# Altium PCB 1.PcbDoc
Units mm, origin at the board's own origin, x right, y up, seen from the top; angles counter-clockwise.
Board outline 89 x 81 mm, 4 copper layers (Top Layer, Internal Plane 1, Internal Plane 2, Bottom Layer); 70 components, 75 nets, 266 pads, 18 vias.
Unrouted connection lines stored in the file: 3.
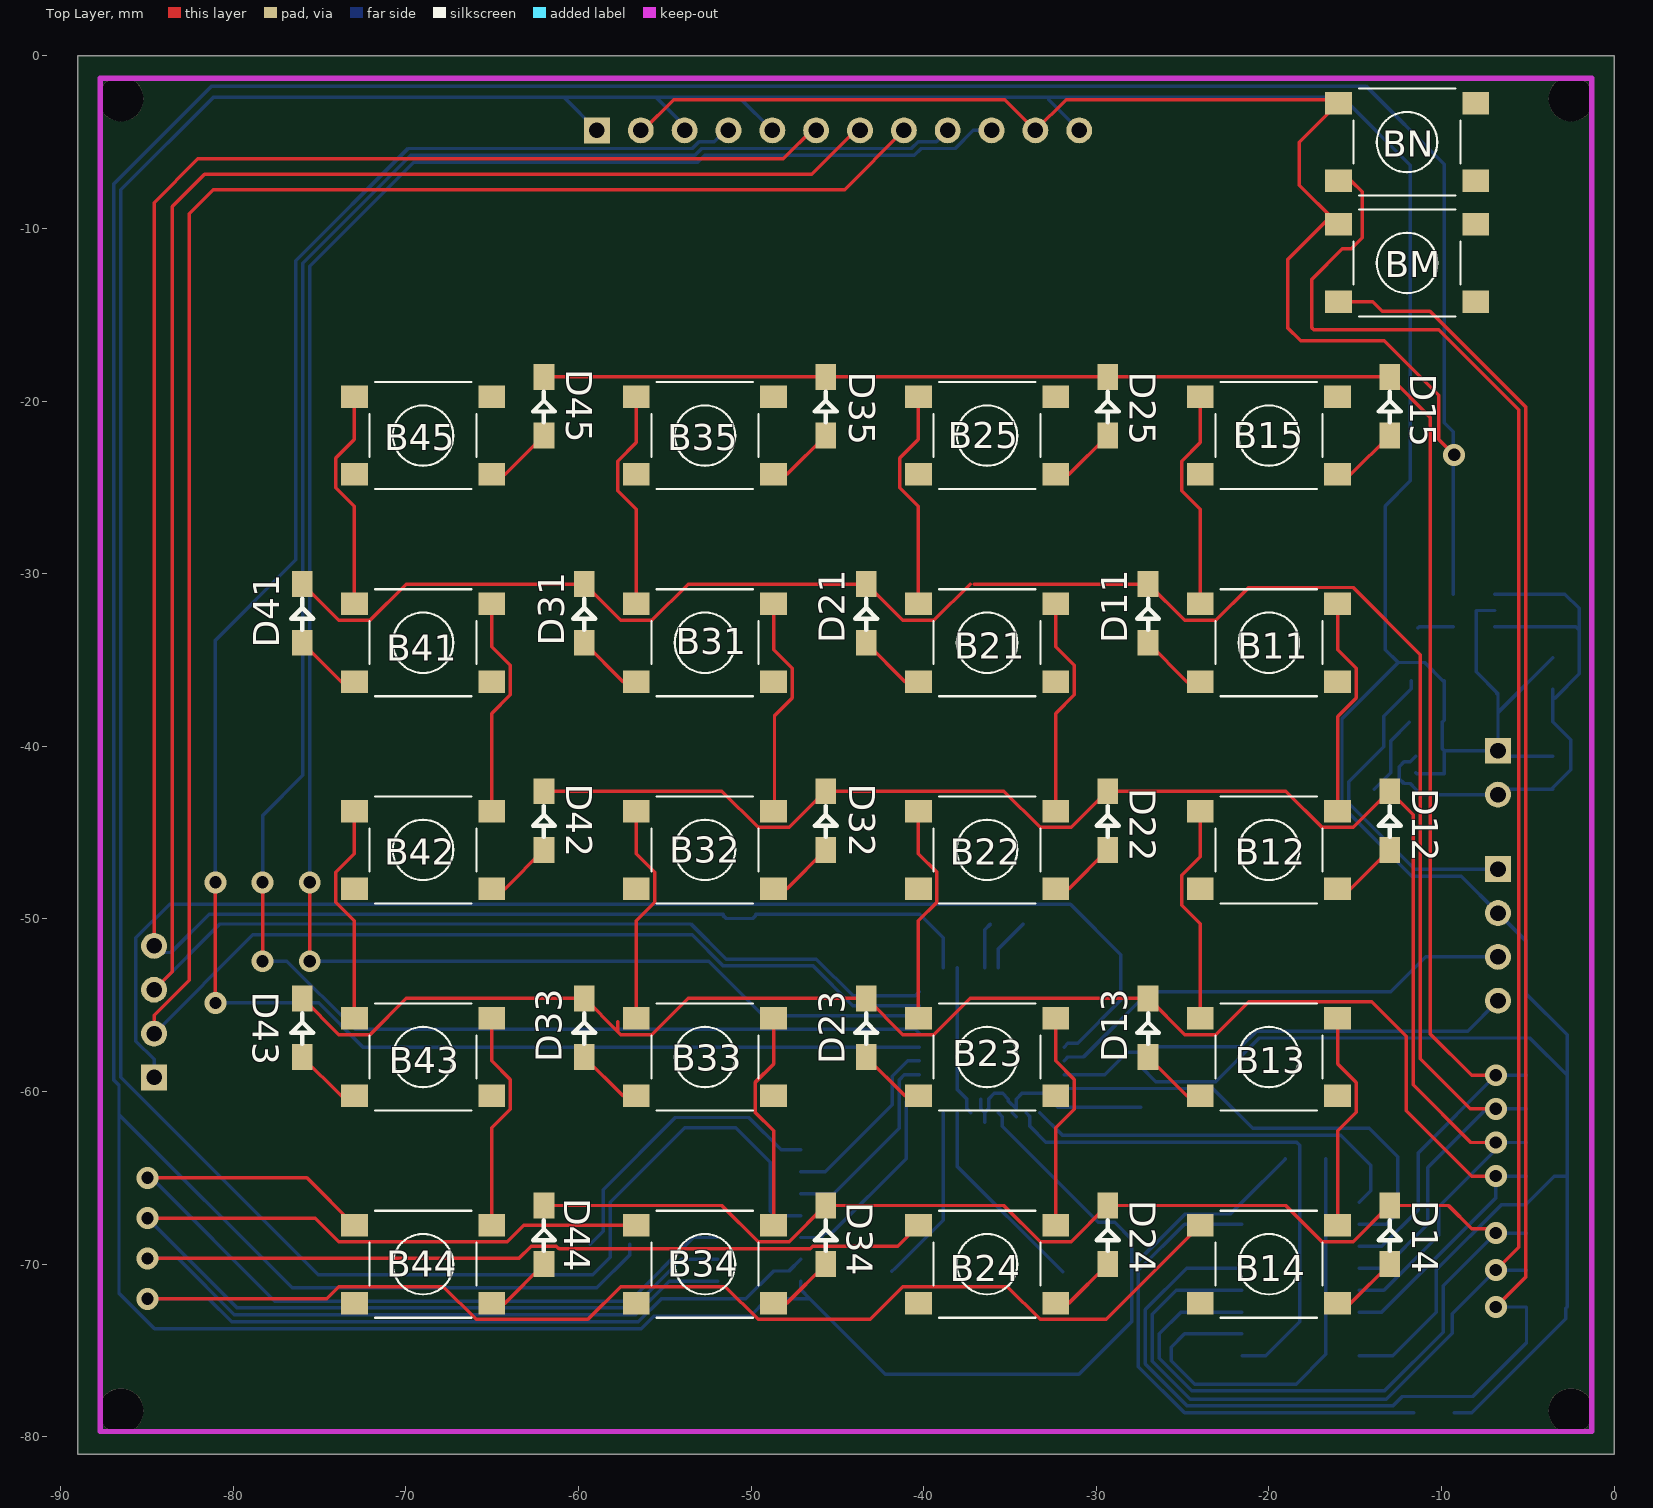
[diagram p0: Top Layer view]
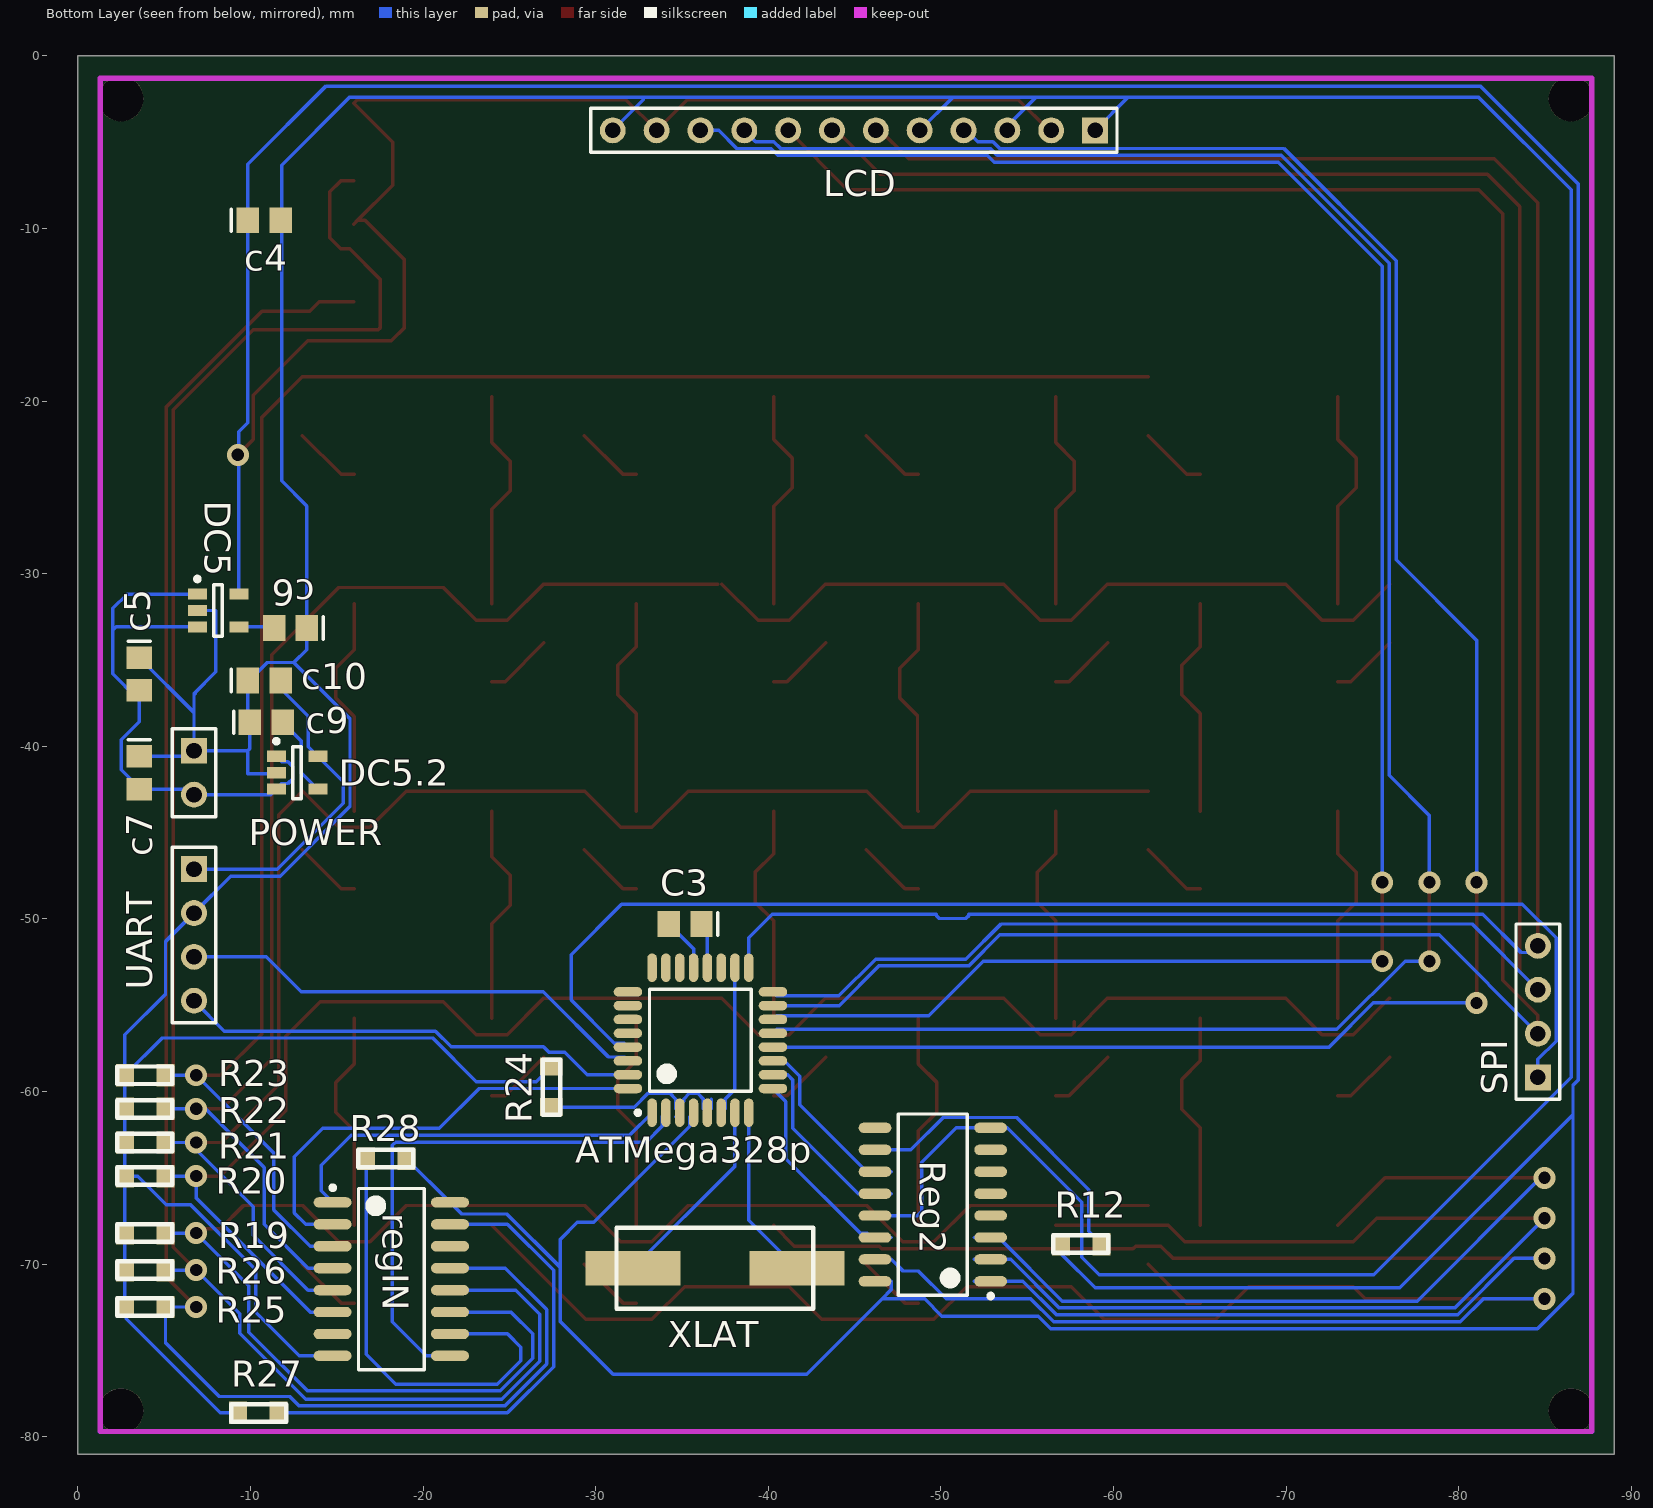
[diagram p1: Bottom Layer view, seen from below]
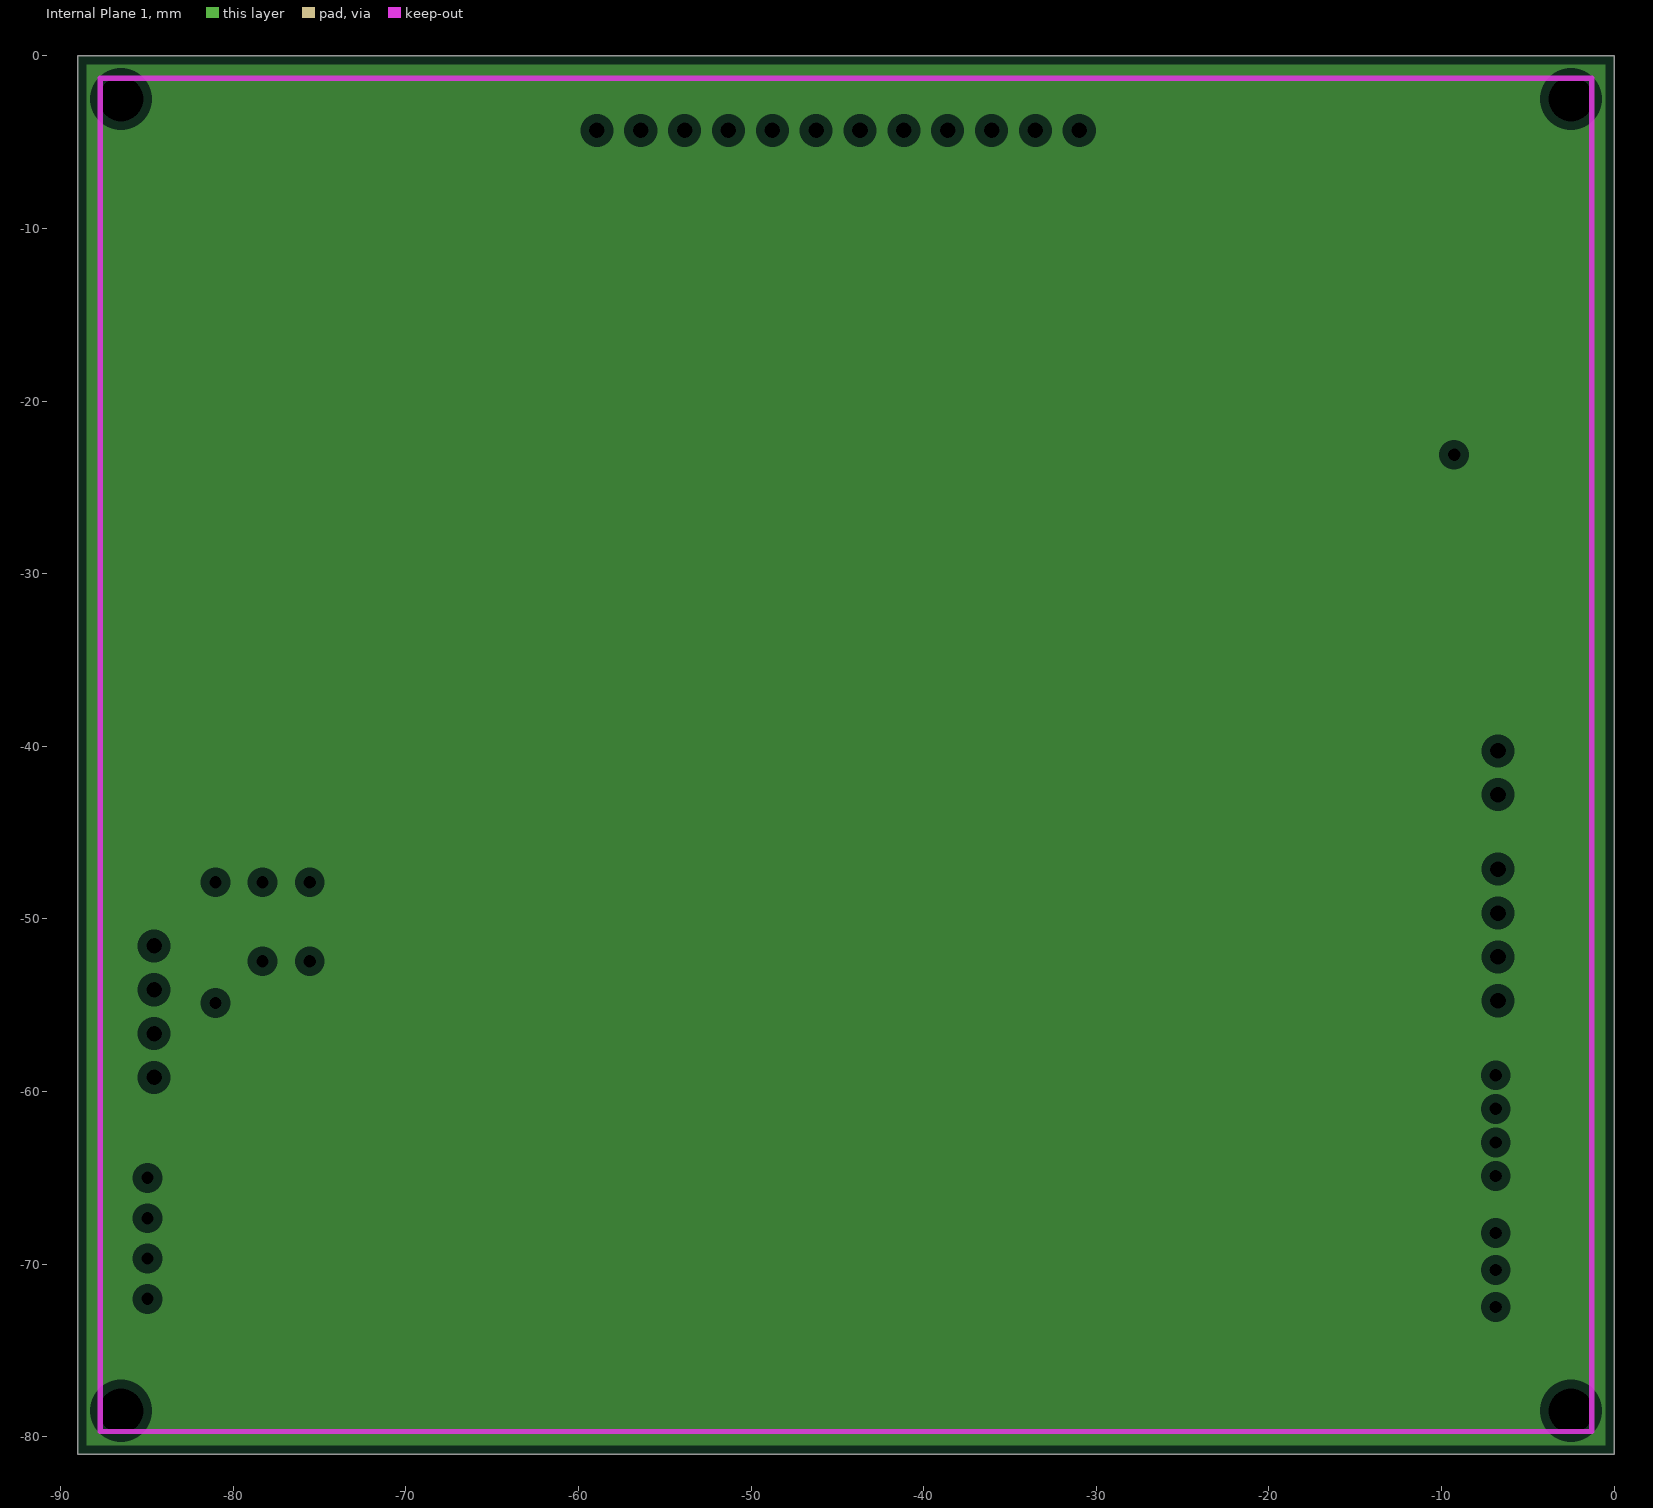
[diagram p2: Internal Plane 1, clearances drawn from the general rule]
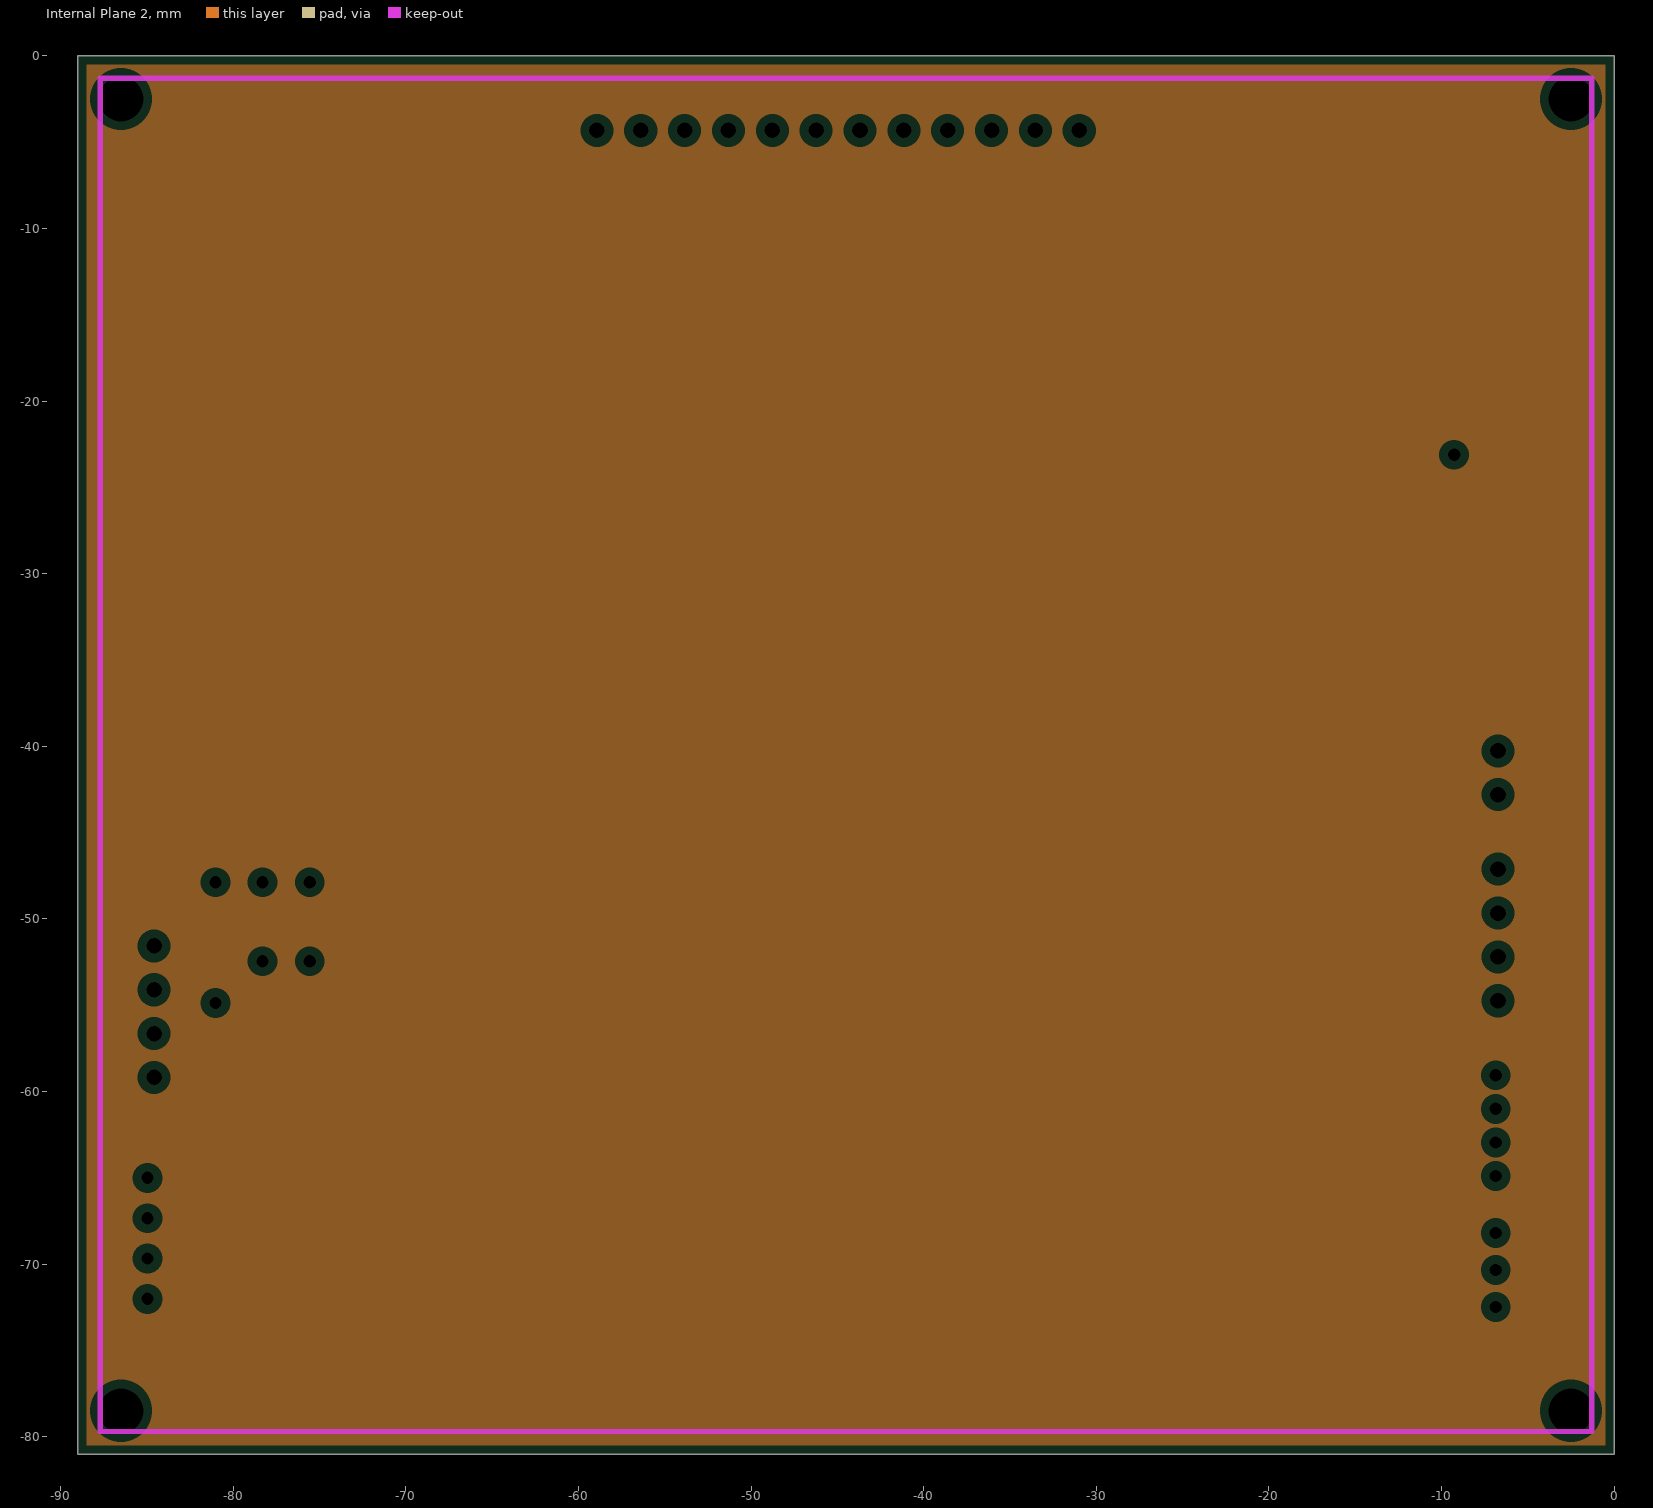
[diagram p3: Internal Plane 2, clearances drawn from the general rule]
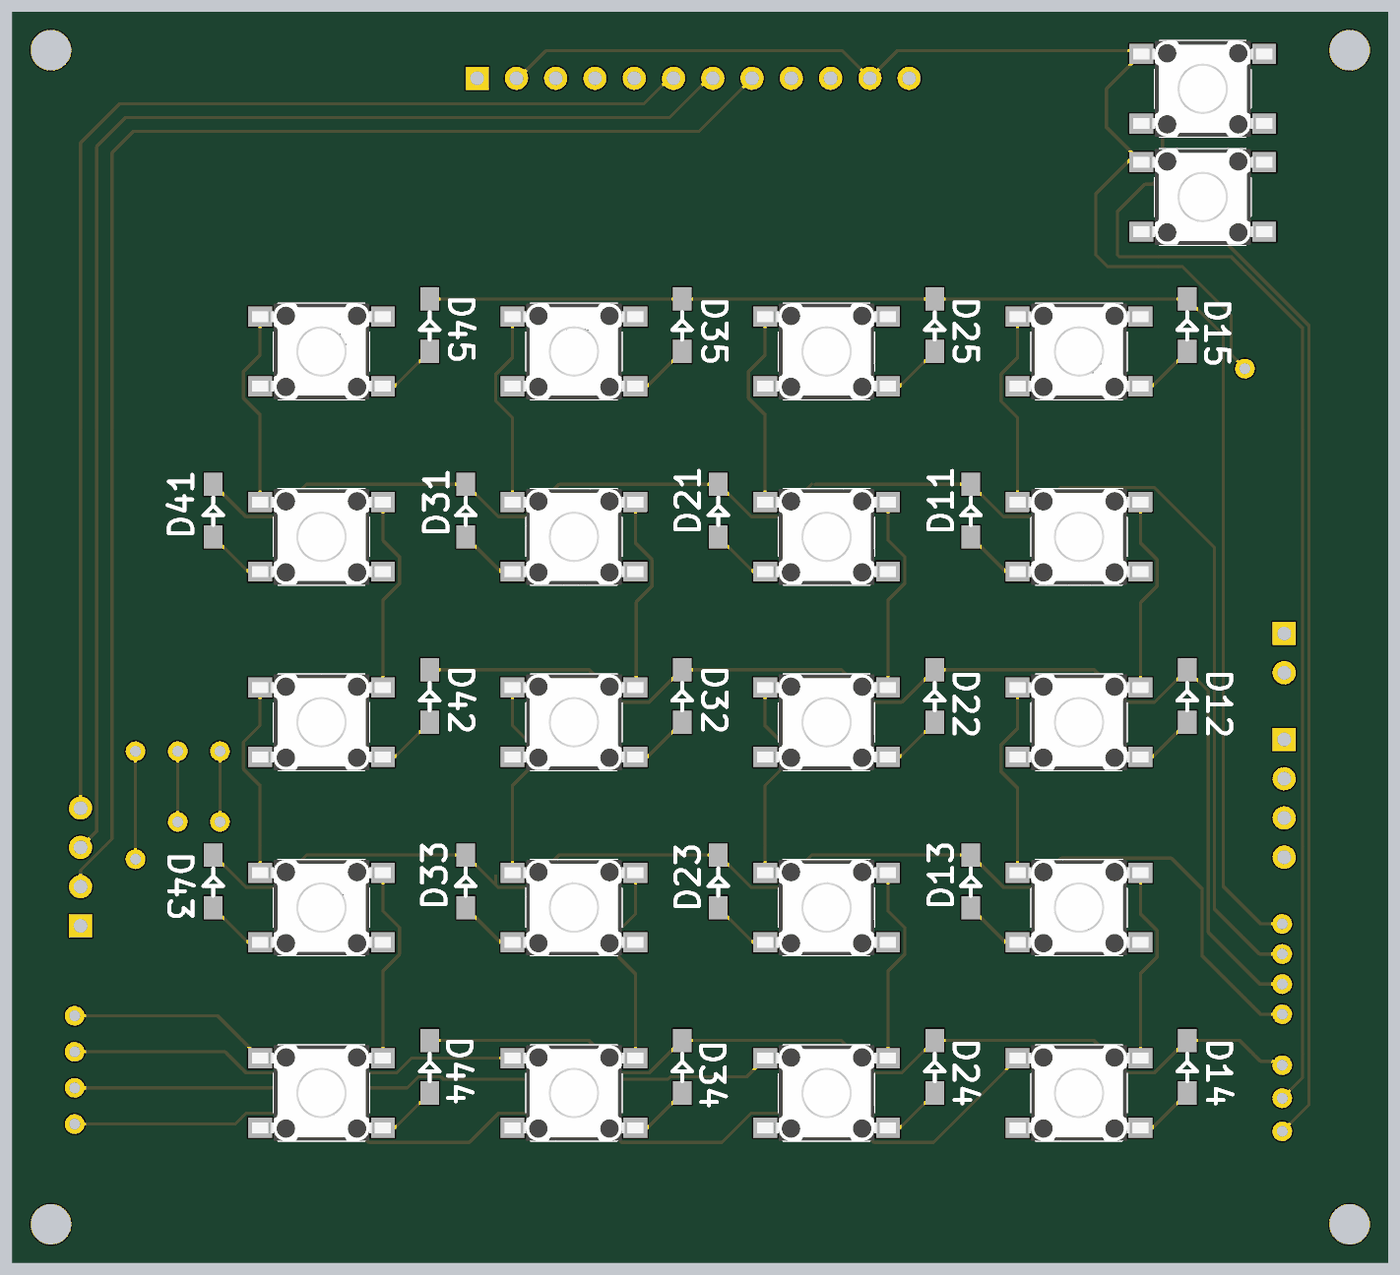
[diagram p4: 3D render of the assembled board from above, using the file's embedded part models]

## Layer stack, top to bottom
Top Solder: solder mask 0.0102, Solder Resist, Dk 3.5
Top Layer: signal copper 0.0356
Dielectric1: dielectric 0.32, FR-4, Dk 4.8
Internal Plane 1: plane copper 0.0356
Dielectric2: dielectric 0.32, FR-4, Dk 4.8
Internal Plane 2: plane copper 0.0356
Dielectric3: dielectric 0.32, FR-4, Dk 4.8
Bottom Layer: signal copper 0.0356
Bottom Solder: solder mask 0.0102, Solder Resist, Dk 3.5

## Board outline
-89,-81 -89,0 0,0 0,-81

## Design rules (kind name [scope] priority, off if disabled: settings)
Clearance [All] p1: gap=0.2
HoleSize [All] p1: absolutevalues=TRUE maxlimit=2.6 minlimit=0.025 maxpercent=80.000 minpercent=20.000
PlaneClearance [All] p1: clearance=0.508
PlaneConnect [All] p1: planeconnectstyle=Relief reliefexpansion=0.508 reliefentries=4 reliefconductorwidth=0.254 reliefairgap=0.254
PolygonConnect [All] p1: connectstyle=Relief reliefconductorwidth=0.254 reliefentries=4 polygonreliefangle="90 Angle" airgapwidth=0.254
RoutingVias [All] p1: holewidth=0.6 width=1 viastyle="Through Hole" minholewidth=0.711 minwidth=1.27 maxholewidth=0.711 maxwidth=1.27
SilkToSolderMaskClearance SilkscreenOverComponentPads [IsPad] p1: minsilkscreentomaskgap=0.254 clearancetoexposedcopper=TRUE
SolderMaskExpansion [All] p1: expansion=0.102
Width [All] p1: maxlimit=0.2 minlimit=0.2 preferedwidth=0.2
26 further rules are at their usual default settings.

## Components (designator, comment, footprint, x,y, rotation, side; value= is the part's Value field where it differs from the comment)
ATMega328p "ATmega328P-AU" 32A_N -36.068,-57.023 r90 bottom
B11 "TS6604" 430182070816 -20,-34 r180 top
B12 "TS6604" 430182070816 -20,-46 r180 top
B13 "TS6604" 430182070816 -20,-58 r180 top
B14 "TS6604" 430182070816 -20,-70 r180 top
B15 "TS6604" 430182070816 -20,-22 r180 top
B21 "TS6604" 430182070816 -36.33,-34 r180 top
B22 "TS6604" 430182070816 -36.33,-46 r180 top
B23 "TS6604" 430182070816 -36.33,-58 r180 top
B24 "TS6604" 430182070816 -36.33,-70 r180 top
B25 "TS6604" 430182070816 -36.33,-22 r180 top
B31 "TS6604" 430182070816 -52.67,-34 r180 top
B32 "TS6604" 430182070816 -52.67,-46 r180 top
B33 "TS6604" 430182070816 -52.67,-58 r180 top
B34 "TS6604" 430182070816 -52.67,-70 r180 top
B35 "TS6604" 430182070816 -52.67,-22 r180 top
B41 "TS6604" 430182070816 -69,-34 r180 top
B42 "TS6604" 430182070816 -69,-46 r180 top
B43 "TS6604" 430182070816 -69,-58 r180 top
B44 "TS6604" 430182070816 -69,-70 r180 top
B45 "TS6604" 430182070816 -69,-22 r180 top
BM "TS6604" 430182070816 -12,-12 r180 top
BN "TS6604" 430182070816 -12,-5 r180 top
C3 "0.1 uF" 0805 -35.179,-50.292 r0 bottom
c4 "2.2 uF" 0805 -10.795,-9.525 r180 bottom
c5 "1 uF" 0805 -3.556,-35.814 r270 bottom
c6 "0.1 nF" 0805 -12.319,-33.147 r0 bottom
c7 "1 uF" 0805 -3.556,-41.529 r270 bottom
c9 "0.1 nF" 0805 -10.922,-38.608 r180 bottom
c10 "2.2 uF" 0805 -10.795,-36.195 r180 bottom
D11 "1N4148WS" sod323 -27,-34 r90 top
D12 "1N4148WS" sod323 -13,-46 r90 top
D13 "1N4148WS" sod323 -27,-58 r90 top
D14 "1N4148WS" sod323 -13,-70 r90 top
D15 "1N4148WS" sod323 -13,-22 r90 top
D21 "1N4148WS" sod323 -43.333,-34 r90 top
D22 "1N4148WS" sod323 -29.333,-46 r90 top
D23 "1N4148WS" sod323 -43.333,-58 r90 top
D24 "1N4148WS" sod323 -29.333,-70 r90 top
D25 "1N4148WS" sod323 -29.33,-22 r90 top
D31 "1N4148WS" sod323 -59.667,-34 r90 top
D32 "1N4148WS" sod323 -45.667,-46 r90 top
D33 "1N4148WS" sod323 -59.667,-58 r90 top
D34 "1N4148WS" sod323 -45.667,-70 r90 top
D35 "1N4148WS" sod323 -45.67,-22 r90 top
D41 "1N4148WS" sod323 -76,-34 r90 top
D42 "1N4148WS" sod323 -62,-46 r90 top
D43 "1N4148WS" sod323 -76,-58 r90 top
D44 "1N4148WS" sod323 -62,-70 r90 top
D45 "1N4148WS" sod323 -62,-22 r90 top
DC5 "LP2985AIM5-1.5" MF05A_N -8.128,-32.131 r180 bottom
DC5.2 "LP2985AIM5-1.5" MF05A_N -12.7,-41.529 r180 bottom
LCD "DS1021" HDR1X12 -58.928,-4.318 r0 bottom
POWER "DS1021" HDR1X2 -6.731,-40.259 r270 bottom
R12 "100k" res_0805 -59.309,-68.834 r0 bottom
R19 "100k" res_0805 -5.08,-68.199 r0 bottom
R20 "100k" res_0805 -5.08,-64.897 r0 bottom
R21 "100k" res_0805 -5.08,-62.95 r0 bottom
R22 "100k" res_0805 -5.08,-61.002 r0 bottom
R23 "100k" res_0805 -5.08,-59.055 r0 bottom
R24 "0u" res_0805 -27.432,-58.547 r270 bottom
R25 "100k" res_0805 -5.08,-72.481 r0 bottom
R26 "100k" res_0805 -5.08,-70.34 r0 bottom
R27 "100k" res_0805 -9.271,-78.613 r180 bottom
R28 "100k" res_0805 -19.05,-63.881 r0 bottom
Reg2 "MC74HC595AD" 966-01_L -49.53,-66.548 r0 bottom
regIN "HD74HC165FP" PRSP0016DH-B_N -18.161,-70.866 r180 bottom
SPI "DS1021" HDR1X4 -84.582,-59.182 r90 bottom
UART "DS1021" HDR1X4 -6.731,-47.117 r270 bottom
XLAT "M49-16.000-18- 30/50/-40+85" cristal -41.656,-70.231 r0 bottom

## Footprints (in the part's own frame and the unit in brackets; to place one, negate y for a bottom-side part, rotate by r counter-clockwise, add the part's x,y. Pads: shape width x height; smd on the part's side, far side on the other; paste and mask are expansions set on the pad)
32A_N [mm] "Thin QFP, 32-Leads, Body 7x7mm, Pitch 0.8mm, IPC Medium Density"
  oval 1.65x0.55 smd: 1(-4.2,2.8) 2(-4.2,2) 3(-4.2,1.2) 4(-4.2,0.4) 5(-4.2,-0.4) 6(-4.2,-1.2) 7(-4.2,-2) 8(-4.2,-2.8) 17(4.2,-2.8) 18(4.2,-2) 19(4.2,-1.2) 20(4.2,-0.4) 21(4.2,0.4) 22(4.2,1.2) 23(4.2,2) 24(4.2,2.8)
  oval 0.55x1.65 smd: 9(-2.8,-4.2) 10(-2,-4.2) 11(-1.2,-4.2) 12(-0.4,-4.2) 13(0.4,-4.2) 14(1.2,-4.2) 15(2,-4.2) 16(2.8,-4.2) 25(2.8,4.2) 26(2,4.2) 27(1.2,4.2) 28(0.4,4.2) 29(-0.4,4.2) 30(-1.2,4.2) 31(-2,4.2) 32(-2.8,4.2)
  silkscreen extent -4.32,-2.95 2.95,3.75, body extent -3.5,-3.5 3.5,3.5, height 1.2
0805 [mm] "Chip Capacitor; Body 2.0 x 1.2 mm (LxW typ)"
  rect 1.3x1.5 smd: 1(-0.95,0) 2(0.95,0)
  silkscreen extent -1.9,-0.65 -1.9,0.65
966-01_L [mm] "SOP, 16-Leads, Body 10.2x5.3mm, Pitch 1.27mm, IPC High Density"
  oval 1.9x0.6 smd: 1(-3.35,4.445) 2(-3.35,3.175) 3(-3.35,1.905) 4(-3.35,0.635) 5(-3.35,-0.635) 6(-3.35,-1.905) 7(-3.35,-3.175) 8(-3.35,-4.445) 9(3.35,-4.445) 10(3.35,-3.175) 11(3.35,-1.905) 12(3.35,-0.635) 13(3.35,0.635) 14(3.35,1.905) 15(3.35,3.175) 16(3.35,4.445)
  silkscreen extent -3.47,-5.25 2,5.42, body extent -2.7,-5.25 2.7,5.25, height 2.05
430182070816 [mm] "6*6mm vertical type, SMD, height 7.0mm, black actuator, 160gf, T&R"
  rect 1.55x1.3 smd: 1(-3.975,2.25) 2(-3.975,-2.25) 3(3.975,2.25) 4(3.975,-2.25)
  silkscreen extent -3.1,-3.1 3.1,3.1, body extent -4.5,-3.1 4.5,3.1, height 7
cristal [mm]
  rect 5.5x2 smd: 0(0,0) 1(9.5,0)
  silkscreen extent -0.95,-2.35 10.45,2.35
HDR1X2 [mm] "Connector; Header; 2 Position"
  rect 1.5x1.5 hole 0.9: 1(0,0)
  round 1.5 hole 0.9: 2(2.54,0)
  silkscreen extent -1.27,-1.27 3.81,1.27
HDR1X4 [mm] "Connector; Header; 4 Position"
  rect 1.5x1.5 hole 0.9: 1(0,0)
  round 1.5 hole 0.9: 2(2.54,0) 3(5.08,0) 4(7.62,0)
  silkscreen extent -1.27,-1.27 8.89,1.27
HDR1X12 [mm] "Connector; Header; 12 Position"
  rect 1.5x1.5 hole 0.9: 1(0,0)
  round 1.5 hole 0.9: 2(2.54,0) 3(5.08,0) 4(7.62,0) 5(10.16,0) 6(12.7,0) 7(15.24,0) 8(17.78,0) 9(20.32,0) 10(22.86,0) 11(25.4,0) 12(27.94,0)
  silkscreen extent -1.27,-1.27 29.21,1.27
MF05A_N [mm] "SOT23, 5-Leads, Body 2.9x1.6mm, Pitch 0.95mm, Lead Span 2.8mm, IPC Medium Density"
  rect 1.1x0.65 smd: 1(-1.2,0.95) 2(-1.2,0) 3(-1.2,-0.95) 4(1.2,-0.95) 5(1.2,0.95)
  silkscreen extent -1.33,-1.5 0.25,1.95, body extent -0.83,-1.49 0.83,1.5, height 1.19
PRSP0016DH-B_N [mm] "SOP, 16-Leads, Body 10.06x5.5mm, Pitch 1.27mm, IPC Medium Density"
  oval 2.2x0.6 smd: 1(-3.4,4.445) 2(-3.4,3.175) 3(-3.4,1.905) 4(-3.4,0.635) 5(-3.4,-0.635) 6(-3.4,-1.905) 7(-3.4,-3.175) 8(-3.4,-4.445) 9(3.4,-4.445) 10(3.4,-3.175) 11(3.4,-1.905) 12(3.4,-0.635) 13(3.4,0.635) 14(3.4,1.905) 15(3.4,3.175) 16(3.4,4.445)
  silkscreen extent -3.52,-5.25 1.9,5.42, body extent -2.7,-5.25 2.7,5.25, height 2.2
res_0805 [mm]
  rect 1.05x1.3 smd: 0(0,0) 1(2.35,0)
  silkscreen extent -0.38,-0.51 2.79,0.51
sod323 [mm]
  rect 1.5x1.2 smd: 0(0,0) 1(3.4,0)
  silkscreen extent 0.76,-0.63 2.54,0.64

## Part data
ATMega328p: "8-bit AVR Microcontroller, 32KB Flash, 1KB EEPROM, 2KB SRAM, 32-pin TQFP, Industrial Grade (-40°C to 85°C)"
B11 B12 B13 B14 B15 B21 B22 B23 B24 B25 B31 B32 B33 B34 B35 B41 B42 B43 B44 B45 BM BN: library part 430182070816, "WS-TASV SMD Tact Switch 6X6 mm"
C3 c4 c5 c6 c7 c9 c10: library part C0805, "Ceramic Chip Capacitor - Standard"
D11 D12 D13 D14 D15 D21 D22 D23 D24 D25 D31 D32 D33 D34 D35 D41 D42 D43 D44 D45: library part SOD323
DC5 DC5.2: "Micropower 150 mA Low-Noise Ultra Low-Dropout Regulator, 5-pin SOT-23"
LCD: library part "Header 12", "Header, 12-Pin"
POWER: library part "Header 2", "Header, 2-Pin"
R12 R19 R20 R21 R22 R23 R24 R25 R26 R27 R28: library part res_0805
Reg2: "8-Bit Serial-Input/Serial or Prallel-Output Shift Register with Latched 3-State Outputs"
regIN: "Parallel-Load 8-bit Shift Register"
SPI UART: library part "Header 4", "Header, 4-Pin"
XLAT: library part cristal_smd

## Free pads (board coordinates)
  round 2.6 hole 2.6: 11(-86.5,-78.5) 12(-86.5,-2.5) 13(-2.5,-78.5) 14(-2.5,-2.5)

## Via types
v1: diameter 1.27, hole 0.711, Top Layer to Bottom Layer, 18 vias

## Nets (pads, with @x,y where several pads share a name; then routed paths per layer and width w, separated by ;. In a path a pad name is that pad's centre, name@x,y a point inside that pad or via, vN(x,y) a via of type N, cw(c..) or ccw(c..) an arc to the next point about the centre after c; other vN are vias at no path point)
3.3V: c10.2 DC5.2.5 UART.1 | length 18.8
  Bottom Layer w0.2: c10.2 -11.745,-36.657 -13.354,-38.266 -13.354,-40.033 DC5.2.5 -15.367,-42.046 -15.367,-43.307 -11.557,-47.117 UART.1
5: ATMega328p.4 ATMega328p.6 ATMega328p.18 BM.4 BN.4 c4.1 DC5.5 LCD.2 LCD.11 R12.1 R28.0 Reg2.16 regIN.16 | length 382.2
  Top Layer w0.2: LCD.2 -56.261,-4.318 -54.483,-2.54 -35.306,-2.54 LCD.11 -31.75,-2.54 -16.185,-2.54 BN.4 -18.232,-5.007 -18.232,-7.493 BM.4@-16.2,-9.525 ; BM.4 BM.4@-16.2,-9.525 ; v1(-9.271,-23.114) -10.16,-22.225 -10.16,-19.666 -13.316,-16.51 -18.161,-16.51 -18.923,-15.748 -18.923,-11.811 -16.637,-9.525 BM.4@-16.2,-9.525
  Bottom Layer w0.2: -86.614,-61.341 -76.581,-71.374 -58.928,-71.374 -57.023,-69.469 R12.1@-57.023,-68.834 ; -47.13,-70.993 -47.13,-71.468 -46.589,-72.009 ; -38.068,-54.986 ATMega328p.18 -38.068,-59.86 -37.493,-60.435 -37.493,-60.998 ATMega328p.6 ; ATMega328p.4 -35.443,-61.448 -35.443,-62.011 -29.876,-67.578 -28.94,-67.578 -27.959,-68.56 -27.959,-70.192 ; R28.0 -19.05,-63.91 regIN.16 -22.231,-67.091 -24.858,-67.091 -27.959,-70.192 ; DC5.5 -9.328,-21.774 -9.845,-21.257 c4.1 -9.845,-6.284 -14.379,-1.75 -81.252,-1.75 -86.906,-7.404 -86.906,-59.348 -86.614,-59.64 -86.614,-71.68 -84.558,-73.736 -56.36,-73.736 -55.633,-73.009 -50.051,-73.009 -49.051,-72.009 -46.589,-72.009 ; -46.589,-72.009 -42.218,-76.38 -31.003,-76.38 -27.959,-73.336 -27.959,-70.192
GND: ATMega328p.3 ATMega328p.5 c4.2 c5.1 c6.1 c7.1 c9.1 c10.1 DC5.2 DC5.2.2 LCD.1 LCD.3 LCD.5 LCD.12 POWER.1 R19.1 R20.1 R21.1 R22.1 R23.1 R24.0 R24.1 R25.1 R26.1 R27.0 Reg2.8 Reg2.13 regIN.8 UART.2 | length 367.4
  Bottom Layer w0.2: LCD.1 -60.833,-2.413 ; LCD.3@-53.848,-4.064 -55.499,-2.413 ; LCD.5 -50.673,-2.413 ; -47.13,-67.183 -48.641,-67.183 -48.895,-66.929 -48.895,-64.089 -50.881,-62.103 -53.848,-62.103 -58.166,-66.421 -58.166,-69.608 -59.17,-70.612 -75.076,-70.612 -86.506,-59.182 -86.506,-7.766 -81.153,-2.413 -60.833,-2.413 ; -36.693,-60.435 -36.693,-60.998 ATMega328p.5 ; ATMega328p.5@-36.468,-61.786 ATMega328p.5 ; ATMega328p.3 ATMega328p.3@-34.643,-61.448 ; LCD.12 -32.766,-2.54 -32.766,-2.413 ; R24.1 -32.231,-60.897 -33.03,-60.098 -34.306,-60.098 -34.643,-60.435 -34.643,-60.998 -35.093,-60.548 -35.093,-60.435 -35.43,-60.098 -35.906,-60.098 -36.243,-60.435 -36.243,-60.998 ATMega328p.5 ; R24.0 -26.556,-59.423 -23.082,-59.423 -20.555,-56.896 -4.889,-56.896 R23.1 ; regIN.8 -12.827,-75.311 -10.306,-72.79 -10.306,-70.325 -6.529,-66.548 -5.132,-66.548 -3.481,-64.897 R20.1 ; DC5.2.2 -11.439,-41.59 -9.84,-41.59 -9.84,-40.259 ; R27.0 -8.255,-78.613 -2.794,-73.152 -2.794,-72.545 R25.1 R26.1 R19.1 R20.1 ; DC5.2 -8.001,-32.131 -8.001,-35.687 -6.731,-36.957 ; -6.797,-36.957 -6.731,-36.957 ; c7.1 -6.411,-40.579 POWER.1 ; c5.1 -6.731,-38.039 ; -60.833,-2.413 -55.499,-2.413 ; -55.499,-2.413 -50.673,-2.413 ; -50.673,-2.413 -32.766,-2.413 ; -32.766,-2.413 -15.73,-2.413 -11.811,-6.332 -11.811,-24.621 -13.269,-26.079 c6.1 -13.269,-34.395 -12.519,-35.145 ; -12.519,-35.145 -15.767,-38.393 -15.767,-43.473 -11.723,-47.517 -8.871,-47.517 UART.2 -5.08,-51.308 -5.08,-54.356 -2.73,-56.706 R23.1 ; -12.519,-35.145 -10.971,-35.145 -9.921,-36.195 c10.1 -9.845,-38.481 c9.1 -9.972,-40.127 -9.84,-40.259 ; -9.84,-40.259 POWER.1 ; POWER.1 -6.731,-38.039 ; -6.731,-38.039 -6.731,-36.957 ; R20.1 R21.1 R22.1 R23.1
NetATMega328p_1: ATMega328p.1 regIN.1 | length 22.9
  Bottom Layer w0.2: ATMega328p.1 -31.96,-62.531 -15.828,-62.531 -14.097,-64.262 -14.097,-65.757 regIN.1
NetATMega328p_2: ATMega328p.2 regIN.9 | length 31.3
  Bottom Layer w0.2: ATMega328p.2 -33.843,-61.448 -33.843,-62.011 -32.923,-62.931 -18.401,-62.931 -18.225,-63.107 -18.225,-73.343 -20.193,-75.311 regIN.9
NetATMega328p_7: ATMega328p.7 XLAT.1 | length 11.8
  Bottom Layer w0.2: ATMega328p.7 -38.068,-64.319 XLAT.1 XLAT.1@-31.943,-70.444
NetATMega328p_8: ATMega328p.8 XLAT.0 | length 10.4
  Bottom Layer w0.2: XLAT.0@-41.844,-70.419 XLAT.0 -38.868,-67.443 ATMega328p.8
NetATMega328p_9: ATMega328p.9 Reg2.14 | length 12.4
  Bottom Layer w0.2: -47.13,-68.453 -45.974,-68.453 -45.72,-68.199 -45.339,-68.199 -41.021,-63.881 -41.021,-60.576 ATMega328p.9
NetATMega328p_10: ATMega328p.10 Reg2.12 | length 11.4
  Bottom Layer w0.2: -47.13,-65.913 -45.212,-65.913 -41.421,-62.122 -41.421,-59.328 -41.116,-59.023 ATMega328p.10
NetATMega328p_11: ATMega328p.11 Reg2.11 | length 10.5
  Bottom Layer w0.2: -47.13,-64.643 -45.708,-64.643 -41.821,-60.756 -41.821,-59.124 -40.92,-58.223 ATMega328p.11
NetATMega328p_12: ATMega328p.12 LCD.4 | length 114.9
  Top Layer w0.2: v1(-81.026,-54.864) v1(-81.026,-47.879)
  Bottom Layer w0.2: v1(-81.026,-54.864) -75.04,-54.864 -72.481,-57.423 ATMega328p.12 ; v1(-81.026,-47.879) -81.026,-33.851 -76.365,-29.19 -76.365,-11.861 -69.872,-5.368 -53.413,-5.368 -53.013,-4.968 -52.143,-4.968 -51.493,-4.318 LCD.4
NetATMega328p_13: ATMega328p.13 LCD.9 | length 121.7
  Top Layer w0.2: v1(-78.295,-52.451) v1(-78.295,-47.879)
  Bottom Layer w0.2: v1(-78.295,-52.451) -76.887,-52.451 -72.94,-56.398 -40.493,-56.398 ATMega328p.13 ; v1(-78.295,-47.879) -78.295,-44.005 -75.965,-41.675 -75.965,-12.026 -69.707,-5.768 -53.247,-5.768 -52.847,-5.368 -40.713,-5.368 -40.313,-4.968 -39.258,-4.968 LCD.9
NetATMega328p_14: ATMega328p.14 LCD.10 | length 119.7
  Top Layer w0.2: v1(-75.565,-52.451) v1(-75.565,-47.879)
  Bottom Layer w0.2: v1(-75.565,-52.451) -52.452,-52.451 -49.305,-55.598 -40.493,-55.598 ATMega328p.14 ; v1(-75.565,-47.879) -75.565,-12.192 -69.541,-6.168 -53.082,-6.168 -52.682,-5.768 -40.547,-5.768 -40.147,-5.368 -38.173,-5.368 -37.123,-4.318 LCD.10
NetATMega328p_15: ATMega328p.15 LCD.8 SPI.2 | length 140.1
  Top Layer w0.2: SPI.2 -84.582,-55.587 -82.55,-53.555 -82.55,-9.144 -81.153,-7.747 -44.577,-7.747 LCD.8
  Bottom Layer w0.2: SPI.2 -78.867,-50.927 -53.41,-50.927 -51.613,-52.724 -46.4,-52.724 -44.101,-55.023 ATMega328p.15
NetATMega328p_16: ATMega328p.16 LCD.7 SPI.3 | length 135.1
  Top Layer w0.2: SPI.3 -83.532,-53.052 -83.532,-8.729 -81.661,-6.858 -46.482,-6.858 LCD.7@-43.815,-4.191
  Bottom Layer w0.2: SPI.3 -80.772,-50.292 -53.479,-50.292 -51.447,-52.324 -46.216,-52.324 -44.092,-54.448 -40.493,-54.448 ATMega328p.16
NetATMega328p_17: ATMega328p.17 LCD.6 SPI.4 | length 132.5
  Top Layer w0.2: SPI.4 -84.582,-8.509 -82.042,-5.969 -48.133,-5.969 LCD.6@-46.355,-4.191
  Bottom Layer w0.2: SPI.4 -84.201,-51.943 -83.604,-51.943 -81.382,-49.721 -51.623,-49.721 -51.623,-49.798 -51.447,-49.974 -49.899,-49.974 -49.723,-49.798 -49.723,-49.721 -40.236,-49.721 -38.868,-51.089 ATMega328p.17
NetATMega328p_20: ATMega328p.20 C3.1 | length 2.7
  Bottom Layer w0.2: ATMega328p.20 -36.468,-50.631 C3.1
NetATMega328p_21: ATMega328p.21 C3.2 | length 3.1
  Bottom Layer w0.2: ATMega328p.21 -35.668,-51.731 C3.2
NetATMega328p_29: ATMega328p.29 SPI.1 | length 74.6
  Bottom Layer w0.2: SPI.1 -84.582,-58.127 -85.632,-57.077 -85.632,-51.088 -83.683,-49.139 ; -83.673,-49.149 -50.673,-49.149 -31.496,-49.149 -28.575,-52.07 -28.575,-54.693 -31.08,-57.198 -31.643,-57.198 ATMega328p.29
NetATMega328p_30: ATMega328p.30 UART.3 | length 27.6
  Bottom Layer w0.2: ATMega328p.30 -31.643,-57.998 -30.743,-57.998 -26.974,-54.229 -12.941,-54.229 -10.909,-52.197 UART.3
NetATMega328p_31: ATMega328p.31 UART.4 | length 26.9
  Bottom Layer w0.2: ATMega328p.31 -29.507,-59.023 -28.206,-57.722 -27.294,-57.722 -26.976,-57.404 -21.628,-57.404 -20.72,-56.496 -8.49,-56.496 UART.4
NetATMega328p_32: ATMega328p.32 regIN.2 | length 26.7
  Bottom Layer w0.2: ATMega328p.32 -23.247,-59.823 -20.939,-62.131 -14.196,-62.131 -12.549,-63.778 -12.549,-67.032 -13.208,-67.691 regIN.2
NetB11_2: B11.2 B12.2 | length 12.9
  Top Layer w0.2: B12.2 -16.025,-38.275 -14.95,-37.2 -14.95,-35.476 -16.025,-34.401 B11.2
NetB11_3: B11.3 D11.0 | length 4
  Top Layer w0.2: D11.0 -24.75,-36.25 B11.3
NetB11_4: B11.4 B15.4 | length 12.9
  Top Layer w0.2: B11.4 -23.975,-26.275 -25.05,-25.2 -25.05,-23.476 -23.975,-22.401 B15.4
NetB12_1: B12.1 D12.0 | length 4
  Top Layer w0.2: B12.1 -15.25,-48.25 D12.0
NetB12_4: B12.4 B13.4 | length 12.9
  Top Layer w0.2: B13.4 -23.975,-50.275 -25.05,-49.2 -25.05,-47.476 -23.975,-46.401 B12.4
NetB13_2: B13.2 B14.2 | length 12.9
  Top Layer w0.2: B14.2 -16.025,-62.275 -14.95,-61.2 -14.95,-59.476 -16.025,-58.401 B13.2
NetB13_3: B13.3 D13.0 | length 4
  Top Layer w0.2: D13.0 -24.75,-60.25 B13.3
NetB14_1: B14.1 D14.0 | length 4
  Top Layer w0.2: B14.1 -15.25,-72.25 D14.0
NetB14_4: B14.4 Reg2.15 | length 107.4
  Top Layer w0.2: v1(-84.963,-72.009) -84.954,-72 -74.574,-72 -73.874,-71.3 -67.824,-71.3 -65.924,-73.2 -59.444,-73.2 -57.544,-71.3 -51.494,-71.3 -49.594,-73.2 -43.104,-73.2 -41.204,-71.3 -35.154,-71.3 -33.254,-73.2 -29.425,-73.2 B14.4
  Bottom Layer w0.2: v1(-84.963,-72.009) -84.954,-72 -81.428,-72 -80.092,-73.336 -56.526,-73.336 -55.19,-72 -50.303,-72 -48.696,-70.393 -47.8,-70.393 -47.13,-69.723
NetB15_1: B15.1 D15.0 | length 4
  Top Layer w0.2: B15.1 -15.25,-24.25 D15.0
NetB21_2: B21.2 B22.2 | length 12.9
  Top Layer w0.2: B22.2 -32.355,-38.099 -31.28,-37.024 -31.28,-35.3 -32.355,-34.225 B21.2
NetB21_3: B21.3 D21.0 | length 4
  Top Layer w0.2: D21.0 -41.083,-36.25 B21.3
NetB21_4: B21.4 B25.4 | length 12.9
  Top Layer w0.2: B21.4 -40.305,-26.099 -41.38,-25.024 -41.38,-23.3 -40.305,-22.225 B25.4
NetB22_1: B22.1 D22.0 | length 4
  Top Layer w0.2: B22.1 -31.583,-48.25 D22.0
NetB22_4: B22.4 B23.4 | length 12.9
  Top Layer w0.2: B23.4 -40.305,-50.099 -39.23,-49.024 -39.23,-47.3 -40.305,-46.225 B22.4
NetB23_2: B23.2 B24.2 | length 12.9
  Top Layer w0.2: B24.2 -32.355,-62.099 -31.28,-61.024 -31.28,-59.3 -32.355,-58.225 B23.2
NetB23_3: B23.3 D23.0 | length 4
  Top Layer w0.2: D23.0 -41.083,-60.25 B23.3
NetB24_1: B24.1 D24.0 | length 4
  Top Layer w0.2: B24.1 -31.583,-72.25 D24.0
NetB24_4: B24.4 Reg2.1 | length 80.8
  Top Layer w0.2: v1(-84.963,-69.667) -63.441,-69.667 -62.724,-68.95 -61.276,-68.95 -61.126,-69.1 -46.567,-69.1 -46.417,-68.95 -41.505,-68.95 B24.4
  Bottom Layer w0.2: v1(-84.963,-69.667) -83.195,-69.667 -79.926,-72.936 -56.692,-72.936 -54.749,-70.993 Reg2.1@-51.93,-70.993
NetB25_1: B25.1 D25.0 | length 4
  Top Layer w0.2: B25.1 -31.58,-24.25 D25.0
NetB31_2: B31.2 B32.2 | length 12.9
  Top Layer w0.2: B32.2 -48.641,-43.696 -48.641,-38.221 -47.62,-37.2 -47.62,-35.476 -48.695,-34.401 B31.2
NetB31_3: B31.3 D31.0 | length 4
  Top Layer w0.2: D31.0 -57.417,-36.25 B31.3
NetB31_4: B31.4 B35.4 | length 12.9
  Top Layer w0.2: B31.4 -56.645,-26.275 -57.72,-25.2 -57.72,-23.476 -56.645,-22.401 B35.4
NetB32_1: B32.1 D32.0 | length 4
  Top Layer w0.2: B32.1 -47.917,-48.25 D32.0
NetB32_4: B32.4 B33.4 | length 12.9
  Top Layer w0.2: B33.4 -56.645,-50.099 -55.57,-49.024 -55.57,-47.3 -56.645,-46.225 B32.4
NetB33_2: B33.2 B34.2 | length 12.9
  Top Layer w0.2: B34.2 -48.695,-62.275 -49.77,-61.2 -49.77,-59.476 -48.695,-58.401 B33.2
NetB33_3: B33.3 D33.0 | length 4
  Top Layer w0.2: D33.0 -57.417,-60.25 B33.3
NetB34_1: B34.1 D34.0 | length 4
  Top Layer w0.2: B34.1 -47.917,-72.25 D34.0
NetB34_4: B34.4 Reg2.2 | length 65.6
  Top Layer w0.2: v1(-84.963,-67.333) -75.241,-67.333 -73.874,-68.7 -64.126,-68.7 -63.176,-67.75 B34.4
  Bottom Layer w0.2: v1(-84.963,-67.333) -79.76,-72.536 -56.857,-72.536 -54.044,-69.723 Reg2.2@-51.93,-69.723
NetB35_1: B35.1 D35.0 | length 4
  Top Layer w0.2: B35.1 -47.92,-24.25 D35.0
NetB41_2: B41.2 B42.2 | length 12.9
  Top Layer w0.2: B42.2 -65.025,-38.099 -63.95,-37.024 -63.95,-35.3 -65.025,-34.225 B41.2
NetB41_3: B41.3 D41.0 | length 4
  Top Layer w0.2: D41.0 -73.75,-36.25 B41.3
NetB41_4: B41.4 B45.4 | length 12.9
  Top Layer w0.2: B41.4 -72.975,-26.099 -74.05,-25.024 -74.05,-23.3 -72.975,-22.225 B45.4
NetB42_1: B42.1 D42.0 | length 4
  Top Layer w0.2: B42.1 -64.25,-48.25 D42.0
NetB42_4: B42.4 B43.4 | length 12.9
  Top Layer w0.2: B43.4 -72.975,-50.099 -74.05,-49.024 -74.05,-47.3 -72.975,-46.225 B42.4
NetB43_2: B43.2 B44.2 | length 12.9
  Top Layer w0.2: B44.2 -65.025,-62.099 -63.95,-61.024 -63.95,-59.3 -65.025,-58.225 B43.2
NetB43_3: B43.3 D43.0 | length 4
  Top Layer w0.2: D43.0 -73.75,-60.25 B43.3
NetB44_1: B44.1 D44.0 | length 4
  Top Layer w0.2: B44.1 -64.25,-72.25 D44.0
NetB44_4: B44.4 Reg2.3 | length 50.6
  Top Layer w0.2: v1(-84.963,-65) -75.725,-65 B44.4
  Bottom Layer w0.2: v1(-84.963,-65) -84.733,-65 -77.597,-72.136 -57.023,-72.136 -53.34,-68.453 Reg2.3@-51.93,-68.453
NetB45_1: B45.1 D45.0 | length 4
  Top Layer w0.2: B45.1 -64.25,-24.25 D45.0
NetBM_3: BM.3 R25.0 regIN.13 | length 104.4
  Top Layer w0.2: BM.3 -13.975,-14.25 -13.425,-14.8 -10.669,-14.8 -5.135,-20.334 -5.135,-70.758 v1(-6.858,-72.481)
  Bottom Layer w0.2: regIN.13 -24.765,-70.231 -27.159,-72.625 -27.159,-75.78 -24.726,-78.213 -12.82,-78.213 -12.27,-77.663 -8.194,-77.663 -5.08,-74.549 R25.0 v1(-6.858,-72.481)
NetBN_3: BN.3 R26.0 regIN.12 | length 110.2
  Top Layer w0.2: BN.3 -15.229,-7.25 -14.605,-7.874 -14.605,-10.541 -15.24,-11.176 -15.751,-11.176 -17.507,-12.932 -17.507,-15.767 -17.399,-15.875 -10.16,-15.875 -5.535,-20.5 -5.535,-69.017 v1(-6.858,-70.34)
  Bottom Layer w0.2: regIN.12 -25.362,-71.501 -26.759,-72.898 -26.759,-75.615 -24.561,-77.813 -13.208,-77.813 -9.39,-73.995 -9.39,-72.872 v1(-6.858,-70.34) R26.0
Netc6_2: c6.2 DC5.4 | length 2.1
  Bottom Layer w0.2: c6.2 -11.303,-33.081 DC5.4
Netc9_2: c9.2 DC5.2.4 | length 4.7
  Bottom Layer w0.2: DC5.2.4 -12.954,-41.533 -12.954,-39.69 c9.2
NetD11_1: D11.1 D21.1 D31.1 D41.1 R22.0 regIN.4 | length 117.4
  Top Layer w0.2: D41.1 -75.974,-30.6 -73.874,-32.7 -72.076,-32.7 -69.976,-30.6 D31.1 -59.644,-30.6 -57.544,-32.7 -55.746,-32.7 -53.646,-30.6 D21.1 -43.304,-30.6 -41.204,-32.7 -39.406,-32.7 -37.306,-30.6 ; -37.077,-30.6 D11.1 -26.974,-30.6 -24.874,-32.7 -23.076,-32.7 -21.176,-30.8 -15.126,-30.8 -11.24,-34.686 -11.24,-58.102 -8.34,-61.002 v1(-6.858,-61.002)
  Bottom Layer w0.2: regIN.4 -13.335,-70.231 -10.795,-67.691 -10.795,-64.401 -7.397,-61.002 v1(-6.858,-61.002) R22.0
NetD12_1: D12.1 D22.1 D32.1 D42.1 R21.0 regIN.5 | length 92.4
  Top Layer w0.2: D42.1 -51.694,-42.6 -49.594,-44.7 -47.796,-44.7 -45.696,-42.6 D32.1 -35.354,-42.6 -33.254,-44.7 -31.456,-44.7 -29.356,-42.6 D22.1 -19.024,-42.6 -16.924,-44.7 -15.126,-44.7 D12.1@-13.026,-42.6 ; D12.1 -11.64,-43.96 -11.64,-59.607 -8.297,-62.95 v1(-6.858,-62.95)
  Bottom Layer w0.2: regIN.5 -13.335,-71.501 -10.16,-68.326 -10.16,-66.675 -6.858,-63.373 v1(-6.858,-62.95) R21.0
NetD13_1: D13.1 D23.1 D33.1 D43.1 R20.0 regIN.6 | length 97
  Top Layer w0.2: D43.1 -75.974,-54.6 -73.874,-56.7 -72.076,-56.7 -69.976,-54.6 D33.1 -59.644,-54.6 -57.72,-56.524 ; -57.72,-55.945 -57.72,-56.524 ; v1(-6.858,-64.897) -8.255,-64.897 -12.04,-61.112 -12.04,-56.794 -14.034,-54.8 -21.176,-54.8 -23.076,-56.7 -24.874,-56.7 -26.974,-54.6 D13.1 -37.306,-54.6 -39.406,-56.7 -41.204,-56.7 -43.304,-54.6 D23.1 -53.646,-54.6 -55.746,-56.7 -57.544,-56.7 -57.72,-56.524
  Bottom Layer w0.2: regIN.6 -13.462,-72.771 -6.858,-66.167 v1(-6.858,-64.897) R20.0
NetD14_1: D14.1 D24.1 D34.1 D44.1 R19.0 regIN.11 | length 95
  Top Layer w0.2: D44.1 -51.694,-66.6 -49.594,-68.7 -47.796,-68.7 -45.696,-66.6 D34.1 -35.354,-66.6 -33.254,-68.7 -31.456,-68.7 -29.356,-66.6 D24.1 -19.024,-66.6 -16.924,-68.7 -15.126,-68.7 -13.026,-66.6 D14.1 -9.6,-66.6 -8.255,-67.945 -7.339,-67.945 v1@-7.085,-68.199
  Bottom Layer w0.2: regIN.11 -25.089,-72.771 -26.359,-74.041 -26.359,-75.449 -24.465,-77.343 -13.304,-77.343 -9.906,-73.945 -9.906,-71.247 v1(-6.858,-68.199) R19.0
NetD15_1: D15.1 D25.1 D35.1 D45.1 R23.0 regIN.3 | length 108.5
  Top Layer w0.2: D45.1 D15.1 -10.668,-20.932 -10.668,-56.642 -8.255,-59.055 v1(-6.858,-59.055)
  Bottom Layer w0.2: regIN.3 -13.462,-68.961 -11.36,-66.859 -11.36,-63.557 v1(-6.858,-59.055) R23.0
NetR12_0: R12.0 Reg2.10 | length 17.4
  Bottom Layer w0.2: R12.0 -58.566,-68.091 -58.566,-65.678 -54.391,-61.503 -50.13,-61.503 -48.26,-63.373 -47.13,-63.373
NetR27_1: R27.1 regIN.15 | length 29.7
  Bottom Layer w0.2: regIN.15 -24.892,-67.691 -27.559,-70.358 -27.559,-75.946 -24.892,-78.613 R27.1
NetR28_1: R28.1 regIN.10 | length 26.8
  Bottom Layer w0.2: regIN.10 -24.892,-74.041 -25.654,-74.803 -25.654,-75.588 -24.299,-76.943 -18.415,-76.943 -16.7,-75.228 R28.1
VIN: c5.2 c7.2 DC5.1 DC5.2.1 DC5.2.3 DC5.3 POWER.2 | length 34
  Bottom Layer w0.2: DC5.2.1 -11.825,-40.904 -12.174,-40.904 -12.446,-41.176 -12.446,-41.882 -12.174,-42.154 -11.825,-42.154 DC5.2.3 -11.18,-42.799 POWER.2 -6.411,-42.479 c7.2 -3.556,-42.403 -2.506,-41.353 -2.506,-39.629 -3.556,-38.579 c5.2 c5.2@-3.556,-36.688 ; DC5.3 -2.225,-33.081 -2.032,-33.274 ; DC5.1 -2.855,-31.181 -2.032,-32.004 -2.032,-35.788 ; c5.2@-3.429,-37.211 -2.019,-35.801
pads on no net: ATMega328p.19 ATMega328p.22 ATMega328p.23 ATMega328p.24 ATMega328p.25 ATMega328p.26 ATMega328p.27 ATMega328p.28 B11.1 B12.3 B13.1 B14.3 B15.2 B15.3 B21.1 B22.3 B23.1 B24.3 B25.2 B25.3 B31.1 B32.3 B33.1 B34.3 B35.2 B35.3 B41.1 B42.3 B43.1 B44.3 B45.2 B45.3 BM.1 BM.2 BN.1 BN.2 Reg2.4 Reg2.5 Reg2.6 Reg2.7 Reg2.9 regIN.7 regIN.14

## Polygon pours and split planes (outlines as drawn)
no net on Internal Plane 1 (split plane): -0.51,-80.49 -88.49,-80.49 -88.49,-0.51 -0.51,-0.51
no net on Internal Plane 2 (split plane): -0.51,-80.49 -88.49,-80.49 -88.49,-0.51 -0.51,-0.51

## Keep-outs
Keep-Out Layer:
  lines w0.3: -87.7,-79.7 -87.7,-1.3 -1.3,-1.3 -1.3,-79.7 -87.7,-79.7

## Silkscreen, mask and mechanical layers (free items; w line width, h text height)
Mechanical 1:
  the board outline again, w0.1
Mechanical 4:
  lines w0.254: -17.145,-46.101 -9.779,-46.101 -8.001,-44.323 -8.001,-44.069 cw(c-3.302,-41.91) -5.461,-37.211 ; -8.636,-44.704 cw(c-8.445,-45.276) -7.874,-45.085
Drill Drawing:
  text ".LEGEND" at 5.08,-75.92 h1.52
  text "Drill Drawing." at 5.08,-78.46 h1.52

## Dimensions
-87.7,-79.7 to -87.7,-1.3 on Mechanical 1
-87.7,-79.7 to -1.3,-79.7 on Mechanical 1